# Altium PCB FootBoard.PcbDoc
Units mil, origin at the board's own origin, x right, y up, seen from the top; angles counter-clockwise.
Board outline 6000 x 4000 mil, 2 copper layers (Top Layer, Bottom Layer); 33 components, 37 nets, 172 pads, 0 vias.
Unrouted connection lines stored in the file: 106.
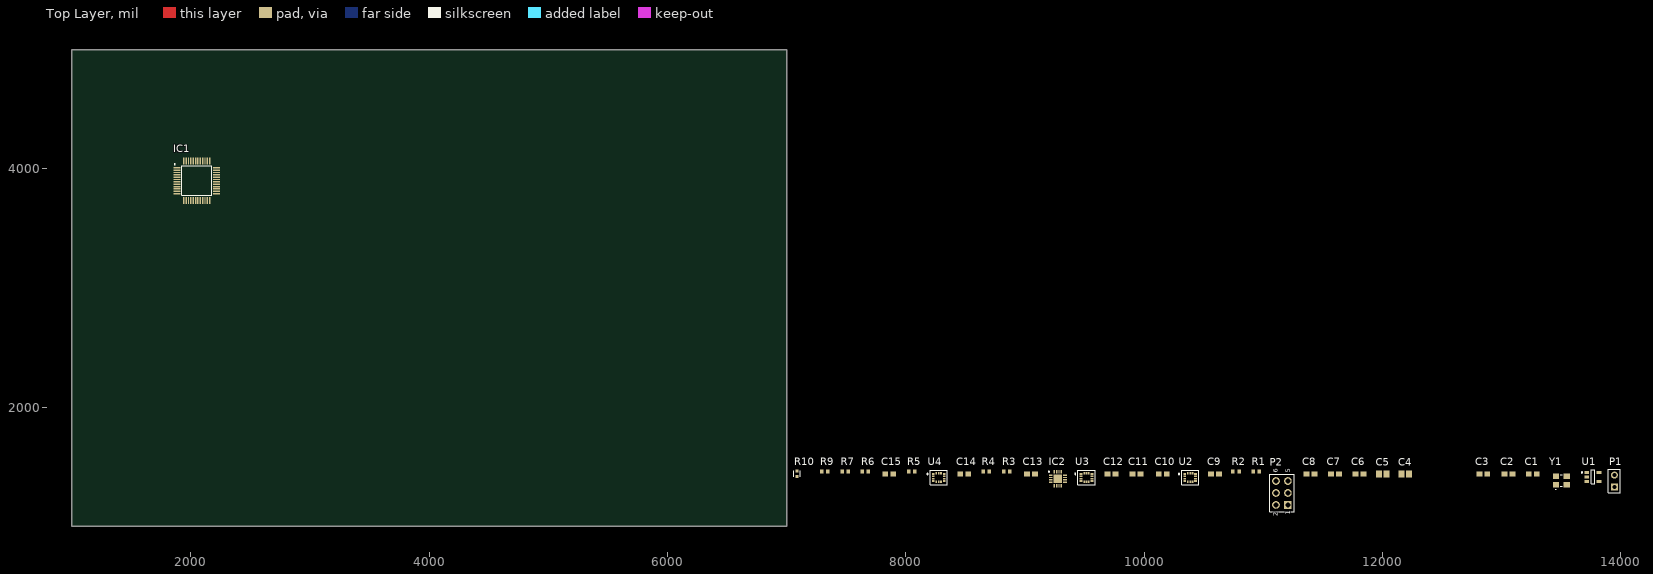
[diagram p0: Top Layer view]
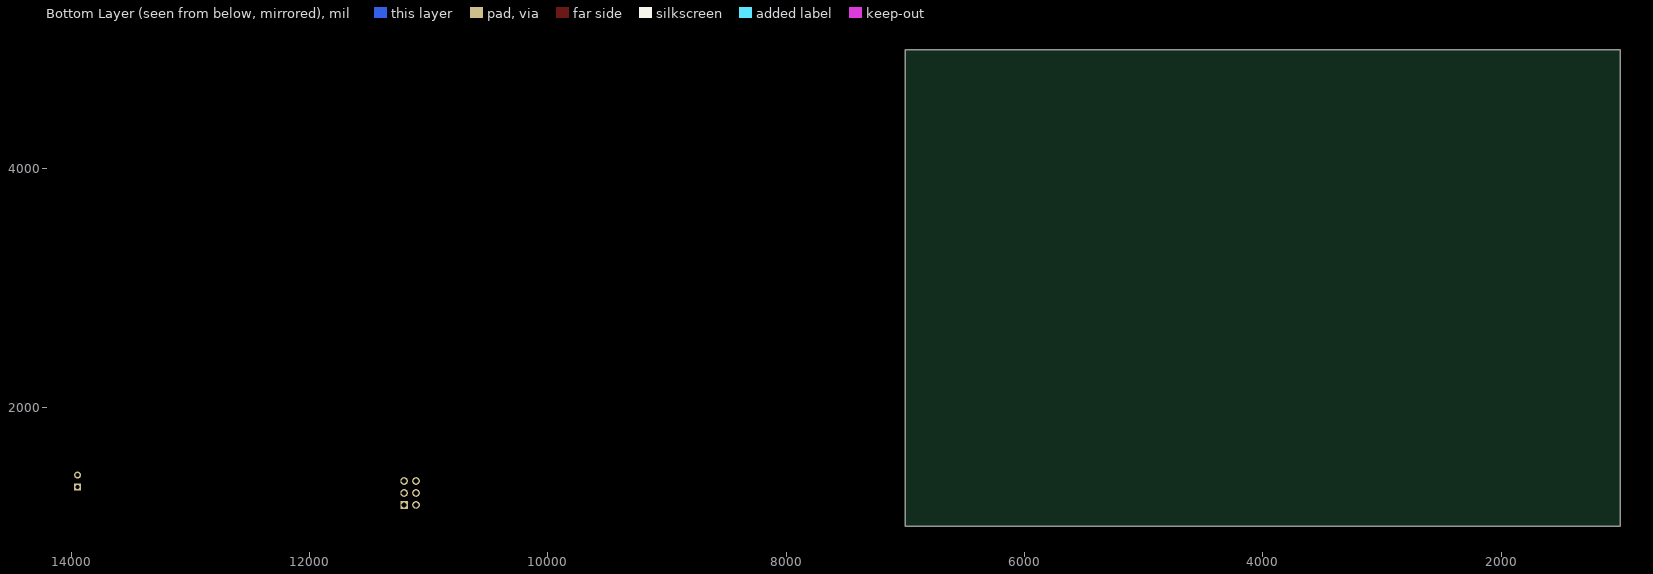
[diagram p1: Bottom Layer view, seen from below]

## Layer stack, top to bottom
Top Solder: solder mask 0.4, Solder Resist, Dk 3.5
Top Layer: signal copper 1.4
Dielectric 1: dielectric 12.6, FR-4, Dk 4.8
Bottom Layer: signal copper 1.4
Bottom Solder: solder mask 0.4, Solder Resist, Dk 3.5

## Board outline
1000,1000 7000,1000 7000,5000 1000,5000

## Design rules (kind name [scope] priority, off if disabled: settings)
Clearance [All] p1: gap=10 ignorepadtopadclearanceinfootprint=FALSE except(0: Arc-Hole Track-Hole SMDPad-Hole THPad-Hole Via-Hole Fill-Hole Poly-Hole Region-Hole Text-Hole)
PolygonConnect [All] p1: connectstyle=Relief reliefconductorwidth=10 reliefentries=4 polygonreliefangle="90 Angle" airgapwidth=10
RoutingVias [All] p1: holewidth=28 width=50 viastyle="Through Hole" minholewidth=28 minwidth=50 maxholewidth=28 maxwidth=50
SolderMaskExpansion [All] p1: expansion=4 istentingtop=FALSE
Width [All] p1: maxlimit=10 minlimit=10 preferedwidth=10
30 further rules are at their usual default settings.

## Components (designator, comment, footprint, x,y, rotation, side; value= is the part's Value field where it differs from the comment)
C1 "100nf" CAPC1608X90X35ML15T15 13260,1440 r0 top
C2 "10nf" CAPC1608X90X35ML15T15 13055,1440 r0 top
C3 "10nf" CAPC1608X90X35ML15T15 12845,1440 r0 top
C4 "20pf" CAPC2013X140X50NL20T25 12190,1440 r0 top
C5 "20pf" CAPC2013X140X50NL20T25 12000,1440 r0 top
C6 "100nf" CAPC1608X90X35ML15T15 11805,1440 r0 top
C7 "100nf" CAPC1608X90X35ML15T15 11600,1440 r0 top
C8 "100nf" CAPC1608X90X35ML15T15 11395,1440 r0 top
C9 "100nf" CAPC1608X90X35ML15T15 10595,1440 r0 top
C10 "100nf" CAPC1608X90X35ML15T15 10155,1440 r0 top
C11 "1uf" CAPC1608X90X35ML15T15 9935,1440 r0 top
C12 "100nf" CAPC1608X90X35ML15T15 9725,1440 r0 top
C13 "100nf" CAPC1608X90X35ML15T15 9050,1440 r0 top
C14 "100nf" CAPC1608X90X35ML15T15 8490,1440 r0 top
C15 "100nf" CAPC1608X90X35ML15T15 7860,1440 r0 top
IC1 "STM32L443CCT6" QFP50P900X900X160-48N 2050,3900 r0 top
IC2 "MLX90395KLW-BBA-001-SP" QFN50P300X300X100-17N-D 9275,1400 r0 top
P1 "3.7V" HDR1X2 13945,1330 r90 top
P2 "61300621121" 61300621121 11155,1280 r90 top
R1 "30k - 0603" RESC1609X55X30LL15T15 10940,1460 r0 top
R2 "30k - 0603" RESC1609X55X30LL15T15 10770,1460 r0 top
R3 "30k - 0603" RESC1609X55X30LL15T15 8845,1460 r0 top
R4 "30k - 0603" RESC1609X55X30LL15T15 8675,1460 r0 top
R5 "10k - 0603" RESC1609X55X30LL15T15 8050,1460 r0 top
R6 "10k - 0603" RESC1609X55X30LL15T15 7660,1460 r0 top
R7 "30k - 0603" RESC1609X55X30LL15T15 7490,1460 r0 top
R9 "10k - 0603" RESC1609X55X30LL15T15 7320,1460 r0 top
R10 "220 Ohms - 0402" FP-PNM0402-MFG 7085,1440 r90 top
U1 "MIC5317-3.3YM5-TR" FP-SOT23-5LD-PL-1-MFG 13765,1415 r0 top
U2 "LSM6DSMTR" FP-LGA-14L-DM00249496-MFG 10385,1410 r0 top
U3 "LSM6DSMTR" FP-LGA-14L-DM00249496-MFG 9515,1410 r0 top
U4 "LSM6DSMTR" FP-LGA-14L-DM00249496-MFG 8275,1410 r0 top
Y1 "ECS-160-12-33-AGN-TR3" ECS1601233AGNTR3 13500,1385 r0 top

## Footprints (in the part's own frame and the unit in brackets; to place one, negate y for a bottom-side part, rotate by r counter-clockwise, add the part's x,y. Pads: shape width x height; smd on the part's side, far side on the other; paste and mask are expansions set on the pad)
61300621121 [mm] "Pin Header, pitch 2.54 mm, THT, Vertical, dual row, 6p"
  rect 1.65x1.65 hole 1.1: 1(-2.54,-1.27)
  round 1.65 hole 1.1: 2(-2.54,1.27) 3(0,-1.27) 4(0,1.27) 5(2.54,-1.27) 6(2.54,1.27)
  silkscreen extent -3.96,-2.62 3.96,2.62, body extent -3.81,-2.54 3.81,2.54, height 8.59
CAPC1608X90X35ML15T15 [mm] "Chip Capacitor, 2-Leads, Body 1.60x0.81mm, IPC Low Density"
  rect 1.25x1.1 smd: 1(-0.85,0) 2(0.85,0)
  body extent -0.88,-0.48 0.87,0.48, height 0.9
CAPC2013X140X50NL20T25 [mm] "Chip Capacitor, 2-Leads, Body 2.00x1.25mm, IPC Medium Density"
  rect 1.3x1.45 smd: 1(-0.8,0) 2(0.8,0)
  body extent -1.1,-0.72 1.1,0.72, height 1.4
ECS1601233AGNTR3 [mm]
  rect 1.3x1.1 smd: 1(-1.15,-0.9) 2(1.15,-0.9) 3(1.15,0.9) 4(-1.15,0.9)
  silkscreen extent -1.25,-2 0.2,1.25, body extent -1.69,-1.34 1.69,1.34, height 0.9
FP-LGA-14L-DM00249496-MFG [mm]
  rect 0.575x0.35 smd paste+0 mask+0: 1(-1.162,0.75) 2(-1.162,0.25) 3(-1.162,-0.25) 4(-1.162,-0.75) 8(1.162,-0.75) 9(1.162,-0.25) 10(1.162,0.25) 11(1.162,0.75)
  rect 0.35x0.575 smd paste+0 mask+0: 5(-0.5,-0.913) 6(0,-0.913) 7(0.5,-0.913) 12(0.5,0.913) 13(0,0.913) 14(-0.5,0.913)
  silkscreen extent -2.5,-1.58 1.83,1.58, body extent -2.05,-1.8 2.05,1.8, height 0.25
FP-PNM0402-MFG [mil]
  rect 25x24 smd paste+0 mask+0: 1(-23.5,0) 2(23.5,0)
  silkscreen extent -25,-28 25,28, body extent -40,-17 40,17, height 10
FP-SOT23-5LD-PL-1-MFG [mm]
  rect 1x0.66 smd paste+0 mask+0: 1(-1.3,0.95) 2(-1.3,0) 3(-1.3,-0.95) 4(1.3,-0.95) 5(1.3,0.95)
  silkscreen extent -2.47,-1.5 0.35,1.5, body extent -1.9,-1.6 1.9,1.6, height 0.25
HDR1X2 [mm] "Connector; Header; 2 Position"
  rect 1.5x1.5 hole 0.9: 1(0,0)
  round 1.5 hole 0.9: 2(2.54,0)
  silkscreen extent -1.27,-1.27 3.81,1.27
QFN50P300X300X100-17N-D [mm]
  rect 0.8x0.3 smd: 1(-1.5,0.75) 2(-1.5,0.25) 3(-1.5,-0.25) 4(-1.5,-0.75) 9(1.5,-0.75) 10(1.5,-0.25) 11(1.5,0.25) 12(1.5,0.75)
  rect 0.3x0.8 smd: 5(-0.75,-1.5) 6(-0.25,-1.5) 7(0.25,-1.5) 8(0.75,-1.5) 13(0.75,1.5) 14(0.25,1.5) 15(-0.25,1.5) 16(-0.75,1.5)
  rect 1.8x1.8 smd: 17(0,0)
  silkscreen extent -2.02,1.38 -1.77,1.62, body extent -1.55,-1.55 1.55,1.55, height 1
QFP50P900X900X160-48N [mm]
  rect 1.475x0.3 smd: 1(-4.238,2.75) 2(-4.238,2.25) 3(-4.238,1.75) 4(-4.238,1.25) 5(-4.238,0.75) 6(-4.238,0.25) 7(-4.238,-0.25) 8(-4.238,-0.75) 9(-4.238,-1.25) 10(-4.238,-1.75) 11(-4.238,-2.25) 12(-4.238,-2.75) 25(4.238,-2.75) 26(4.238,-2.25) 27(4.238,-1.75) 28(4.238,-1.25) 29(4.238,-0.75) 30(4.238,-0.25) 31(4.238,0.25) 32(4.238,0.75) 33(4.238,1.25) 34(4.238,1.75) 35(4.238,2.25) 36(4.238,2.75)
  rect 0.3x1.475 smd: 13(-2.75,-4.238) 14(-2.25,-4.238) 15(-1.75,-4.238) 16(-1.25,-4.238) 17(-0.75,-4.238) 18(-0.25,-4.238) 19(0.25,-4.238) 20(0.75,-4.238) 21(1.25,-4.238) 22(1.75,-4.238) 23(2.25,-4.238) 24(2.75,-4.238) 37(2.75,4.238) 38(2.25,4.238) 39(1.75,4.238) 40(1.25,4.238) 41(0.75,4.238) 42(0.25,4.238) 43(-0.25,4.238) 44(-0.75,4.238) 45(-1.25,4.238) 46(-1.75,4.238) 47(-2.25,4.238) 48(-2.75,4.238)
  silkscreen extent -4.85,-3.15 3.15,3.62, body extent -4.5,-4.5 4.5,4.5, height 1.6
RESC1609X55X30LL15T15 [mm] "Chip Resistor, 2-Leads, Body 1.75x0.95mm, IPC High Density"
  rect 0.75x0.85 smd: 1(-0.65,0) 2(0.65,0)
  body extent -0.87,-0.48 0.87,0.48, height 0.55

## Part data
C1 C2 C3 C6 C7 C8 C9 C10 C11 C12 C13 C14 C15: library part CMP-2006-04543-1, Manufacturer="AVX Interconnect / Elco", Part Number=0603YG105ZAT4A
C4 C5: library part CMP-2007-04537-1, Manufacturer="AVX Interconnect / Elco", Part Number=08051A200JAT2A
IC1: "Integrated Circuit", Manufacturer_Name=STMicroelectronics, Mouser Part Number=511-STM32L443CCT6, Arrow Part Number=STM32L443CCT6, Arrow Price/Stock=https://www.arrow.com/en/products/stm32l443cct6/stmicroelectronics?region=nac, Datasheet Link=https://componentsearchengine.com/Datasheets/2/STM32L443CCT6.pdf, Height=1.6mm, Manufacturer_Part_Number=STM32L443CCT6, Mouser Price/Stock=https://www.mouser.co.uk/ProductDetail/STMicroelectronics/STM32L443CCT6?qs=dTJS0cRn7ohLPtZ3IeJ%2Fbg%3D%3D
IC2: "Integrated Circuit", Manufacturer_Name=Melexis, Mouser Part Number=482-90395KLWBBA001SP, Datasheet Link=https://www.mouser.de/datasheet/2/734/Melexis_MLX90395_Datasheet_Melexis3-1863596.pdf, Height=1mm, Manufacturer_Part_Number=MLX90395KLW-BBA-001-SP, Mouser Price/Stock=https://www.mouser.co.uk/ProductDetail/Melexis/MLX90395KLW-BBA-001-SP?qs=7MVldsJ5Uawn%252BTu7jMWOxA%3D%3D
P1: library part "Header 2", "Header, 2-Pin", LatestRevisionDate=17-Jul-2002, LatestRevisionNote="Re-released for DXP Platform.", Publisher="Altium Limited"
P2: library part CMP-1502-01072-1, "THT Vertical Pin Header WR-PHD, Pitch 2.54 mm, Dual Row, 6 pins", Contact Resistance=20mOhm, Manufacturer="Wurth Elektronik", Operating Temperature=-40to105degC, Rated Current=3A, Withstanding Voltage=500VAC, Working Voltage=250VAC, Datasheet URL=https://katalog.we-online.de/em/datasheet/6130xx21121.pdf, Gender=Male, Manufacturer URL=http://www.we-online.de, Mounting Technology=THT, Orientation=Vertical, Package Reference=61300621121, Packaging=Bag, Part Number=61300621121, Pin Number=6, Pitch=2.54mm, Publisher=WurthElektronik, Row Number=Dual
R1 R2 R3 R4 R5 R6 R7 R9: library part CMP-1012-00623-3, "Chip Resistor, 10 KOhm, +/- 1%, 0.1 W, -55 to 155 degC, 0603 (1608 Metric), RoHS, Tape and Reel", Case Code (Imperial)=0603, Case Code (Metric)=1608, Manufacturer=Panasonic, Max Operating Temperature=155degC, Max Power Dissipation=100mW, Min Operating Temperature=-55degC, Package Description="2-Pin Surface Mount Device, Body 1.6 x 0.85 mm", Package Quantity=1, Package Reference=603, Resistance=10KOhm, Temperature Coefficient=100ppm\/degreesC, Tolerance=1%, Voltage Rating=75V, Case\/Package=0603, Composition=ThickFilm, Contact Plating=Tin, Datasheet URL=https://industrial.panasonic.com/cdbs/www-data/pdf/RDA0000/AOA0000C304.pdf, Datasheet Version=02/2017, Depth=0.8mm, Height=0.45mm, Lead Free=LeadFree, Length=1.6mm, Manufacturer URL=http://www.panasonic.com/, Military Standard=Not, Mount=SurfaceMount, Mounting Technology=SurfaceMount, Number of Pins=2, Number of Terminations=2, Packaging=TapeandReel, Power Rating=100mW, Radiation Hardening=No, REACH SVHC=NoSVHC, RoHSCompliant=true, Termination=SMD/SMT, Voltage Rating (DC)=75V, Width=0.031inch
R10: library part CMP-02407-011888-1, "RES SMD 500 OHM 0.1% 1/20W 0402", Case Code (Imperial)=0402, Case Code (Metric)=1005, Max Operating Temperature=155°C, Max Power Dissipation=50mW, Min Operating Temperature=-55°C, Package Quantity=1000, Resistance=500R, Resistor Type="Thin Film", Temperature Coefficient=25ppm/°C, Tolerance=0.1%, Case/Package=0402, Features="Moisture Resistant", Height=0.033inch, Lead Free="Lead Free", Length=0.042inch, Number of Terminations=2, Packaging="Tape and Reel", RoHS Compliant=Yes, Width=0.022inch
U1: library part CMP-06324-000116-1, "IC REG LINEAR 3.3V 150MA SOT23-5", Case/Package=SOT-23-5, Dropout Voltage=155mV, Max Input Voltage=6V, Max Operating Temperature=125°C, Min Current Limit=200mA, Min Input Voltage=2.5V, Min Operating Temperature=-40°C, Output Current=150mA, Output Voltage=3.3V, Package Quantity=3000, Power Supply Rejection Ratio (PSRR)=70dB, Mount="Surface Mount", Number of Outputs=1, Number of Regulators=1, Packaging="Tape and Reel", RoHS Compliant=No, Series=-
U2 U3 U4: library part CMP-12177-000008-1, "IMU ACCEL/GYRO I2C/SPI 14LGA", Manufacturer=STMicroelectronics, Max Supply Voltage=3.6V, Min Supply Voltage=1.62V, Operating Supply Current=0.29-0.65mA, Package=LGA-14L-DM00249496, Temperature="-40°C to +85°C", Temperature Range High=+85°C, Temperature Range Low=-40°C, Accel Range=2/4/8/16g, Automotive=No, Category=IC, ComponentLink2Description=Datasheet, ComponentLink2URL=https://www.st.com/resource/en/datasheet/lsm6dsm.pdf, Device Class L1=Sensors, Device Class L2="Motion Sensors", Device Class L3="Inertial Measurement Units (IMUs)", Digikey Description="IMU ACCEL/GYRO I2C/SPI 14LGA", Footprint Url=https://www.st.com/content/ccc/resource/technical/document/technical_note/73/17/9c/16/dd/96/4a/01/CD00134799.pdf/files/CD00134799.pdf/jcr:content/translations/en.CD00134799.pdf, Gyro Range=125/250/500/1000/2000°/s, Height=0.86mm, Lead Free=Yes, Manufacturer Part Number=LSM6DSMTR, Mouser Description="LSM6DSM Series 3.6 V I2C/SPI 3D Accelerometer and 3D Gyroscope - LGA-14", Octopart=https://octopart.com/lsm6dsmtr-stmicroelectronics-66358194, Resolution=16bits, RoHS=TRUE, Sensor Output=I2C,SPI, Sensor Type=Temperature,Accelerometer,Gyroscope
Y1: "Crystal or Oscillator", Manufacturer_Name=ECS, Mouser Part Number=520-160-12-33AGN-TR3, Arrow Part Number=ECS-160-12-33-AGN-TR3, Arrow Price/Stock=https://www.arrow.com/en/products/ecs-160-12-33-agn-tr3/ecs-international?region=nac, Datasheet Link=https://ecsxtal.com/store/pdf/ecx-32.pdf, Height=0.8mm, Manufacturer_Part_Number=ECS-160-12-33-AGN-TR3, Mouser Price/Stock=https://www.mouser.co.uk/ProductDetail/ECS/ECS-160-12-33-AGN-TR3?qs=e8oIoAS2J1R5dXUdgVaN0g%3D%3D

## Nets (pads, with @x,y where several pads share a name; then routed paths per layer and width w, separated by ;. In a path a pad name is that pad's centre, name@x,y a point inside that pad or via, vN(x,y) a via of type N, cw(c..) or ccw(c..) an arc to the next point about the centre after c; other vN are vias at no path point)
3v3: C1.2 C2.2 C3.2 C6.2 C7.2 C8.2 C9.2 C10.2 C11.2 C13.2 C14.2 C15.2 IC1.1 IC1.9 IC1.24 IC1.36 IC1.48 IC2.15 P1.1 P2.5 R1.1 R2.1 R3.1 R4.1 R5.2 R6.1 R7.1 R9.1 U1.1 U1.3 U1.5 U3.5 U3.8 U4.5 U4.8
FLASH_CS: IC1.26 R5.1
GND: C1.1 C2.1 C3.1 C4.1 C5.1 C6.1 C7.1 C8.1 C9.1 C10.1 C11.1 C12.1 C13.1 C14.1 C15.1 IC1.8 IC1.23 IC1.35 IC1.47 IC2.13 P1.2 P2.3 R10.1 U1.2 U1.4 U2.2 U2.3 U2.6 U2.7 U3.6 U3.7 U4.2 U4.3 U4.6 U4.7 Y1.2 Y1.4
I2C_SDA: IC2.5 U3.2
IMU1_CS: IC1.18 R4.2 U3.12
IMU1_INT1: IC1.32 U3.4
IMU1_INT2: IC1.33 U3.9
IMU2_CS: IC1.19 R7.2 U4.12
IMU2_INT1: IC1.30 U4.4
IMU2_INT2: IC1.31 U4.9
IMU3_CS: IC1.20 R3.2 U2.12
IMU3_INT1: IC1.13 U2.4
IMU3_INT2: IC1.14 U2.9
IMU_CLK: IC2.3 U3.3
MAG_INT: IC1.10 IC2.1
MAG_INT_TRG: IC1.12 IC2.7
NetC12_2: C12.2 U2.5 U2.8
NetIC3_3: R6.2
NetIC3_7: R9.2
NetLED1_1: R10.2
NRST: IC1.7 P2.1
OSC_IN: C5.2 IC1.5 Y1.1
OSC_OUT: C4.2 IC1.6 Y1.3
SPI1_CLK: IC1.11 U2.13 U3.13 U4.13
SPI1_MISO: IC1.16 U2.1 U3.1 U4.1
SPI1_MOSI: IC1.17 U2.14 U3.14 U4.14
SPI2_CLK: IC1.21
SPI2_MISO: IC1.27
SPI2_MOSI: IC1.28
SPI3_ATTN: IC1.43
SPI3_CLK: IC1.39
SPI3_MISO: IC1.40
SPI3_MOSI: IC1.41
SWCLK: IC1.37 P2.4
SWDIO: IC1.34 P2.2
XBEE_CS: IC1.38 R2.2
XBEE_PR: R1.2
pads on no net: IC1.2 IC1.3 IC1.4 IC1.15 IC1.22 IC1.25 IC1.29 IC1.42 IC1.44 IC1.45 IC1.46 IC2.2 IC2.4 IC2.6 IC2.8 IC2.9 IC2.10 IC2.11 IC2.12 IC2.14 IC2.16 IC2.17 P2.6 U2.10 U2.11 U3.10 U3.11 U4.10 U4.11

## Text inside footprints (layer, text, board x,y; h text height)
P2: Top Overlay "6" at 11119.57,1448.11 h40 r90; Top Overlay "5" at 11225.87,1448.11 h40 r90; Top Overlay "2" at 11119.57,1084.33 h40 r90; Top Overlay "1" at 11225.87,1096.14 h40 r90